# Altium PCB PCB1.PcbDoc
Units mm, origin at the board's own origin, x right, y up, seen from the top; angles counter-clockwise.
Board outline 150 x 90 mm, 2 copper layers (Top Layer, Bottom Layer); 10 components, 33 nets, 114 pads, 0 vias.
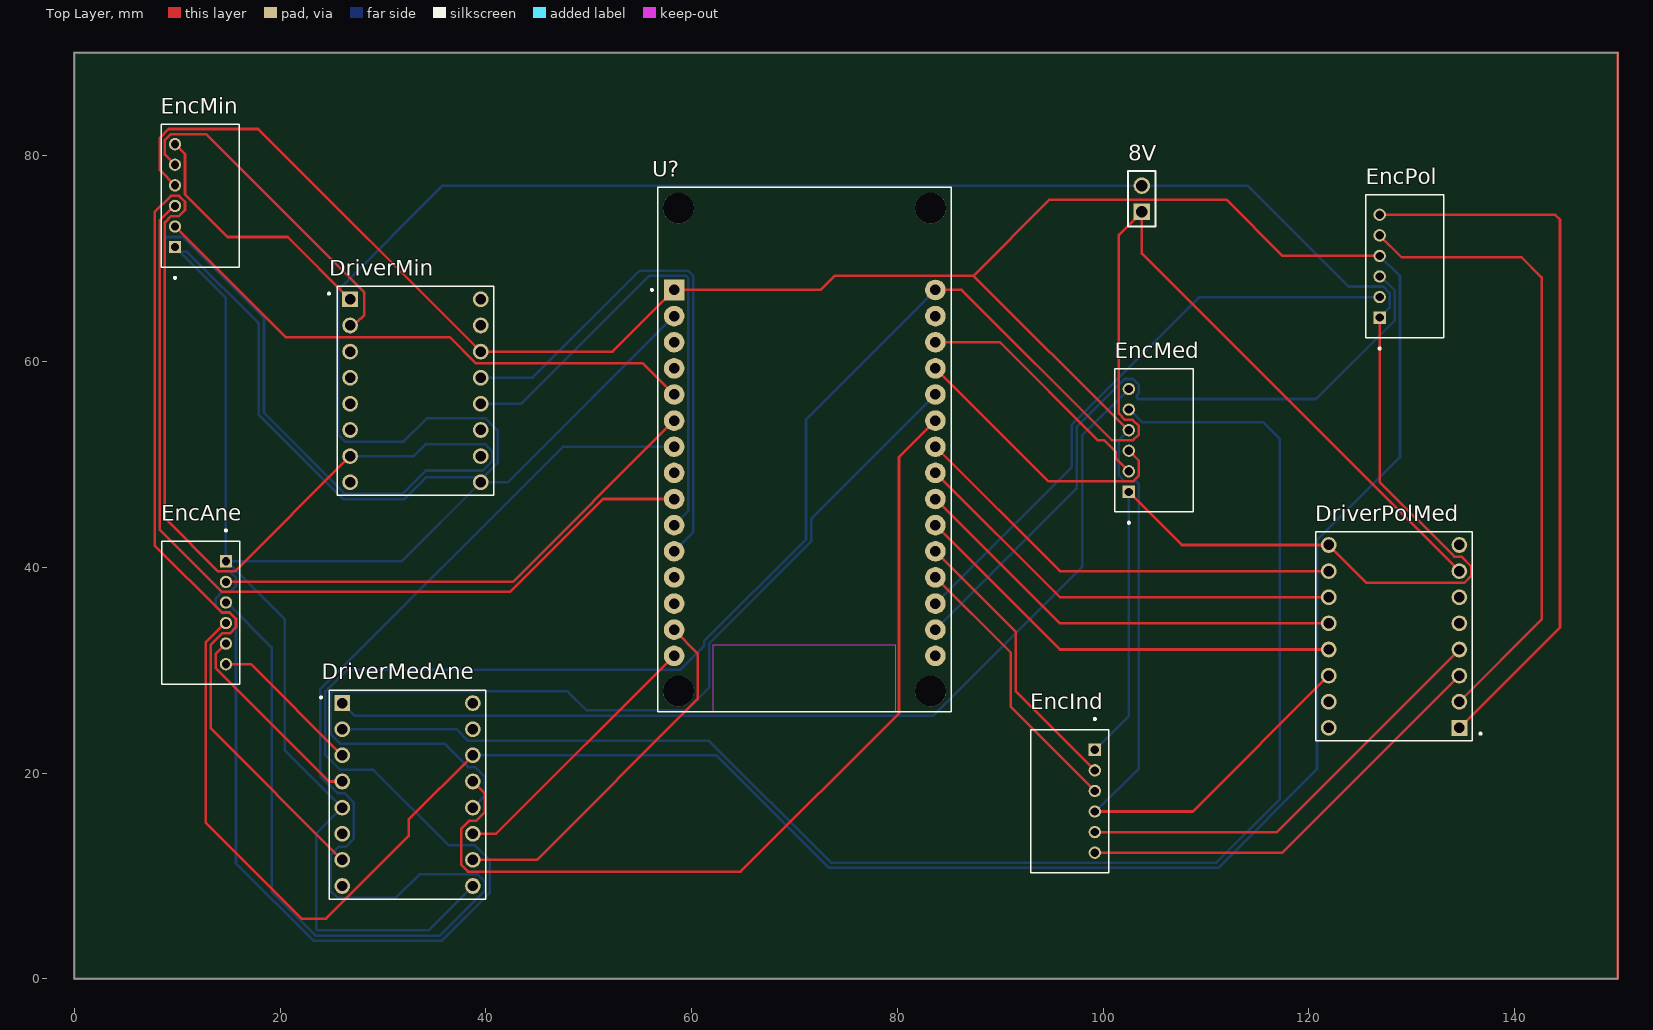
[diagram p0: Top Layer view]
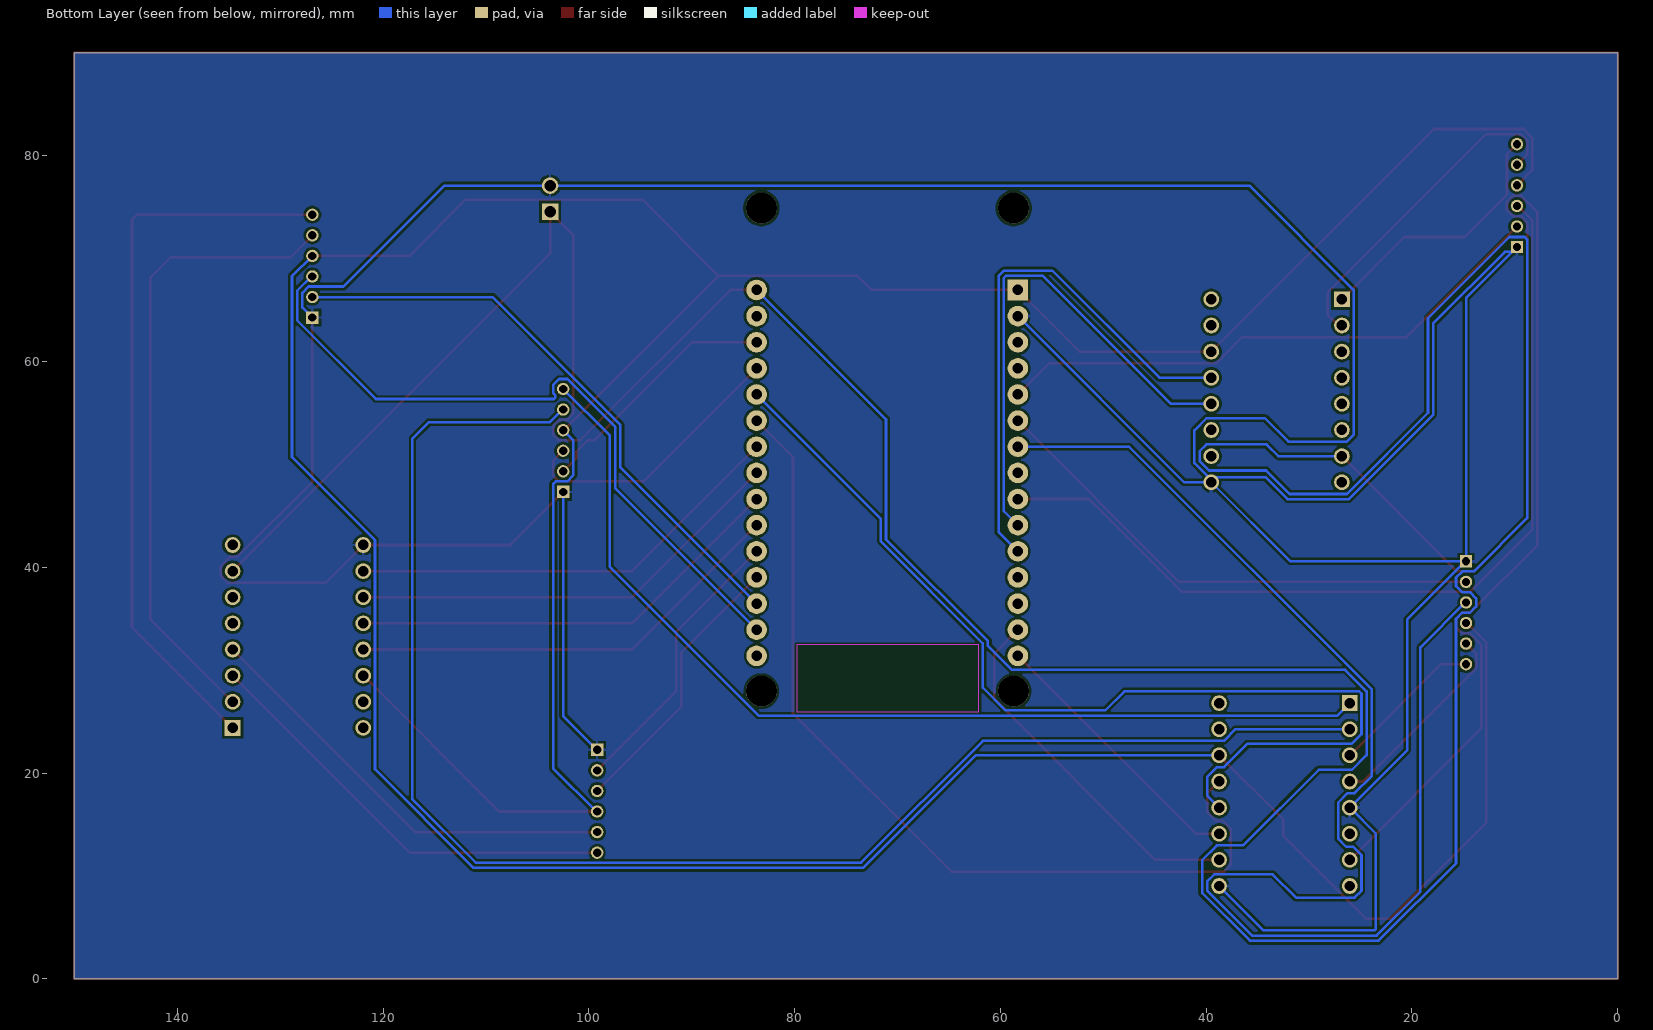
[diagram p1: Bottom Layer view, seen from below]

## Layer stack, top to bottom
Top Solder: solder mask 0.0102, Solder Resist, Dk 3.5
Top Layer: signal copper 0.0356
Dielectric 1: dielectric 0.32, FR-4, Dk 4.8
Bottom Layer: signal copper 0.0356
Bottom Solder: solder mask 0.0102, Solder Resist, Dk 3.5

## Board outline
0,0 150,0 150,90 0,90

## Design rules (kind name [scope] priority, off if disabled: settings)
Clearance [All] p1: gap=0.25 ignorepadtopadclearanceinfootprint=FALSE
HoleSize [All] p1: absolutevalues=TRUE maxlimit=10 minlimit=0.4 maxpercent=80.000 minpercent=20.000
PolygonConnect [All] p1: connectstyle=Relief reliefconductorwidth=0.254 reliefentries=4 polygonreliefangle="90 Angle" airgapwidth=0.254
RoomDefinition Sheet_Control [InComponentClass('Sheet_Control')] p1: confinementstyle=ConfineIn formatcopy=TRUE lockcomponents=FALSE outline 0,0 150.114,0 150.114,90.17 0,90.17
RoutingVias [All] p1: holewidth=0.4 width=0.9 viastyle="Through Hole" minholewidth=0.4 minwidth=0.9 maxholewidth=10 maxwidth=10
SilkToSilkClearance [All] p1: silktosilkclearance=0.25
SolderMaskExpansion [All] p1: expansion=0.102 istentingtop=FALSE
Width [All] p1: maxlimit=10 minlimit=0.25 preferedwidth=0.25
28 further rules are at their usual default settings.

## Components (designator, comment, footprint, x,y, rotation, side; value= is the part's Value field where it differs from the comment)
8V "61300211121" 61300211121 103.759,75.819 r90 top
DriverMedAne "A4990_STEPPER_MOTOR_DRIVER_CARRIER" MODULE_A4990_STEPPER_MOTOR_DRIVER_CARRIER 32.385,17.907 r0 top
DriverMin "A4990_STEPPER_MOTOR_DRIVER_CARRIER" MODULE_A4990_STEPPER_MOTOR_DRIVER_CARRIER 33.147,57.15 r0 top
DriverPolMed "A4990_STEPPER_MOTOR_DRIVER_CARRIER" MODULE_A4990_STEPPER_MOTOR_DRIVER_CARRIER 128.27,33.274 r180 top
EncAne "S6B-PH-K-S(LF)(SN)" JST_S6B-PH-K-S(LF)(SN) 14.732,35.576 r270 top
EncInd "S6B-PH-K-S(LF)(SN)" JST_S6B-PH-K-S(LF)(SN) 99.187,17.256 r270 top
EncMed "S6B-PH-K-S(LF)(SN)" JST_S6B-PH-K-S(LF)(SN) 102.489,52.324 r90 top
EncMin "S6B-PH-K-S(LF)(SN)" JST_S6B-PH-K-S(LF)(SN) 9.779,76.121 r90 top
EncPol "S6B-PH-K-S(LF)(SN)" JST_S6B-PH-K-S(LF)(SN) 126.873,69.262 r90 top
U? "ESP32-DEVKIT-V1" ESP32_DEVKIT_V1 70.993,51.435 r0 top

## Footprints (in the part's own frame and the unit in brackets; to place one, negate y for a bottom-side part, rotate by r counter-clockwise, add the part's x,y. Pads: shape width x height; smd on the part's side, far side on the other; paste and mask are expansions set on the pad)
61300211121 [mm] "Pin Header, pitch 2.54 mm, THT, Vertical, single row, 2p"
  rect 1.6x1.6 hole 1.1: 1(-1.27,0)
  round 1.6 hole 1.1: 2(1.27,0)
  silkscreen extent -2.69,-1.35 2.69,1.35, body extent -2.54,-1.27 2.54,1.27, height 8.57
ESP32_DEVKIT_V1 [mm]
  rect 2x2 hole 1.02: 1(-12.7,15.515)
  round 2 hole 1.02: 2(-12.7,12.975) 3(-12.7,10.435) 4(-12.7,7.895) 5(-12.7,5.355) 6(-12.7,2.815) 7(-12.7,0.275) 8(-12.7,-2.265) 9(-12.7,-4.805) 10(-12.7,-7.345) 11(-12.7,-9.885) 12(-12.7,-12.425) 13(-12.7,-14.965) 14(-12.7,-17.505) 15(-12.7,-20.045) 16(12.7,-20.045) 17(12.7,-17.505) 18(12.7,-14.965) 19(12.7,-12.425) 20(12.7,-9.885) 21(12.7,-7.345) 22(12.7,-4.805) 23(12.7,-2.265) 24(12.7,0.275) 25(12.7,2.815) 26(12.7,5.355) 27(12.7,7.895) 28(12.7,10.435) 29(12.7,12.975) 30(12.7,15.515)
  round 3 hole 3 unplated: ""(-12.28,-23.475) ""(-12.28,23.475) ""(12.23,-23.475) ""(12.23,23.475)
  Keep-Out Layer region: 8.78,-25.475 -8.91,-25.475 -8.91,-18.985 8.78,-18.985
  Keep-Out Layer region: 8.78,-25.475 -8.91,-25.475 -8.91,-18.985 8.78,-18.985
  Keep-Out Layer region: 8.78,-25.475 -8.91,-25.475 -8.91,-18.985 8.78,-18.985
  silkscreen extent -14.95,-25.48 14.23,25.48, body extent -14.48,-25.5 14.02,25.43, height 9.22
JST_S6B-PH-K-S(LF)(SN) [mm]
  rect 1.2x1.2 hole 0.8: 1(-5,0)
  round 1.2 hole 0.8: 2(-3,0) 3(-1,0) 4(1,0) 5(3,0) 6(5,0)
  silkscreen extent -8.1,-6.25 6.95,1.35
MODULE_A4990_STEPPER_MOTOR_DRIVER_CARRIER [mm]
  rect 1.53x1.53 hole 1.02: 1(-6.35,8.89)
  round 1.53 hole 1.02: 2(-6.35,6.35) 3(-6.35,3.81) 4(-6.35,1.27) 5(-6.35,-1.27) 6(-6.35,-3.81) 7(-6.35,-6.35) 8(-6.35,-8.89) 9(6.35,-8.89) 10(6.35,-6.35) 11(6.35,-3.81) 12(6.35,-1.27) 13(6.35,1.27) 14(6.35,3.81) 15(6.35,6.35) 16(6.35,8.89)
  silkscreen extent -8.5,-10.16 7.62,10.16

## Part data
8V: "WR-PHD Pin Header, THT, pitch 2.54mm, Single Row, Vertical, 2pin", Contact Resistance=20mOhm, Operating Temperature="-40 to +105degC", Rated Current=3A, Withstanding Voltage=500VAC, Working Voltage=250VAC, ComponentLink1Description=Manufacturer, ComponentLink1URL=http://www.we-online.de, ComponentLink2Description=Datasheet, ComponentLink2URL=https://katalog.we-online.de/em/datasheet/6130xx11121.pdf, Gender=Male, Mounting Technology=THT, Orientation=Vertical, Packaging=Bag, Part Number=61300211121, Pin Number=2, Pitch=2.54mm, Published Date="June 2019", Publisher="Wurth Elektronik", Row Number=Single
DriverMedAne DriverMin DriverPolMed: "Stepper motor controler; IC: A4990", Package=None, Availability=Unavailable, MP=A4988_STEPPER_MOTOR_DRIVER_CARRIER, Price=None
EncAne EncInd EncMed EncMin EncPol: "PH Series 6 Position 2 mm Pitch Through Hole Side Entry Shrouded Header", Package=None, Availability=Unavailable, MP=S6B-PH-K-S(LF)(SN), Price=None
U?: "Dual core, Wi-Fi: 2.4 GHz up to 150 Mbits/s,BLE (Bluetooth Low Energy) and legacy Bluetooth, 32 bits, Up to 240 MHz", Package=None, Availability="Not in stock", Check_prices=https://www.snapeda.com/parts/ESP32-DEVKIT-V1/Do+it/view-part/?ref=eda, MF="Do it", MP=ESP32-DEVKIT-V1, Price=None, SnapEDA_Link=https://www.snapeda.com/parts/ESP32-DEVKIT-V1/Do+it/view-part/?ref=snap

## Nets (pads, with @x,y where several pads share a name; then routed paths per layer and width w, separated by ;. In a path a pad name is that pad's centre, name@x,y a point inside that pad or via, vN(x,y) a via of type N, cw(c..) or ccw(c..) an arc to the next point about the centre after c; other vN are vias at no path point)
Net8V_1: 8V.1 DriverMedAne.7 DriverMin.7 DriverPolMed.7 U?.30 | length 504.6
  Top Layer w0.25: DriverMedAne.7 13.257,24.335 13.257,32.48 14.353,33.576 15.111,33.576 15.707,34.172 15.707,34.98 15.086,35.601 14.328,35.601 7.804,42.125 7.804,74.525 9.375,76.096 10.183,76.096 10.754,75.525 10.754,74.717 10.158,74.121 9.4,74.121 8.804,73.525 8.804,44.774 13.977,39.601 15.598,39.601 DriverMin.7 ; U?.30 86.229,66.95 100.83,52.349 102.893,52.349 103.464,52.92 103.464,53.728 102.868,54.324 102.11,54.324 101.514,54.92 101.514,72.304 8V.1 103.759,70.485 DriverPolMed.7
  Bottom Layer w0.25: DriverMin.7 32.986,50.8 34.126,51.94 39.969,51.94 40.637,51.272 40.637,50.328 39.709,49.4 34.157,49.4 31.877,47.12 26.325,47.12 18.43,55.015 18.43,64.201 10.534,72.096 9.024,72.096 8.804,71.876 8.804,44.774 13.977,39.601 15.086,39.601 15.707,38.98 15.707,38.172 15.111,37.576 14.353,37.576 13.757,36.98 13.757,36.172 14.353,35.576 15.111,35.576 15.707,34.98 15.707,11.219 23.227,3.699 35.736,3.699 40.375,8.338 40.375,11.529 38.947,12.957 36.407,12.957 29.047,20.317 25.823,20.317 24.395,21.745 24.395,27.924 26.486,30.015 58.863,30.015 61.208,32.36 61.208,32.812 71.11,42.715 71.11,54.367 U?.30
Net8V_2: 8V.2 DriverMedAne.5 DriverMedAne.9 DriverMin.9 DriverPolMed.9 EncAne.1 EncInd.1 EncMed.1 EncMin.1 EncPol.1 U?.2 | length 432.9
  Top Layer w0.25: EncMed.1 107.649,42.164 DriverPolMed.9 125.6,38.484 135.092,38.484 135.76,39.152 135.76,40.096 134.832,41.024 134.148,41.024 126.873,48.299 EncPol.1
  Bottom Layer w0.25: EncMin.1 EncMin.1@10.254,70.646 ; DriverMedAne.9 34.417,4.699 23.641,4.699 23.495,4.845 23.495,14.097 DriverMedAne.5 20.463,22.209 20.463,34.931 15.293,40.101 15.207,40.101 EncAne.1 ; U?.2 42.143,48.26 DriverMin.9 31.813,40.576 EncAne.1 ; EncInd.1 102.489,25.558 EncMed.1 ; EncPol.1 127.848,65.237 127.848,66.666 127.227,67.287 123.848,67.287 114.046,77.089 8V.2 35.786,77.089 25.657,66.96 25.657,52.868 26.325,52.2 32.007,52.2 34.287,54.48 39.969,54.48 41.137,53.312 41.137,50.121 39.776,48.76 34.224,48.76 32.084,46.62 26.118,46.62 17.93,54.808 17.93,63.678 10.961,70.646 EncMin.1@10.254,70.646 ; EncMin.1@10.254,70.646 14.732,66.168 EncAne.1
NetDriverMedAne_1: DriverMedAne.1 EncMed.6 | length 97.6
  Bottom Layer w0.25: DriverMedAne.1 27.247,25.585 83.5,25.585 97.947,40.032 97.947,52.782 EncMed.6
NetDriverMedAne_2: DriverMedAne.2 EncMed.5 | length 149.9
  Bottom Layer w0.25: DriverMedAne.2 37.123,24.257 38.263,23.117 61.7,23.117 73.536,11.281 110.987,11.281 117.14,17.435 117.14,52.506 115.537,54.11 103.789,54.11 102.575,55.324 EncMed.5
NetDriverMedAne_3: DriverMedAne.3 EncAne.6 | length 15
  Top Layer w0.25: EncAne.6 17.176,30.576 DriverMedAne.3
NetDriverMedAne_4: DriverMedAne.4 EncAne.5 | length 19.6
  Top Layer w0.25: EncAne.5 13.757,31.601 13.757,30.172 24.752,19.177 DriverMedAne.4
NetDriverMedAne_10: DriverMedAne.10 U?.14 | length 36
  Top Layer w0.25: DriverMedAne.10 44.962,11.557 60.588,27.183 60.588,31.635 U?.14
NetDriverMedAne_11: DriverMedAne.11 U?.15 | length 26.7
  Top Layer w0.25: DriverMedAne.11 41,14.097 U?.15
NetDriverMedAne_12: DriverMedAne.12 U?.26 | length 100.3
  Bottom Layer w0.25: DriverMedAne.12 39.875,17.777 39.875,19.649 38.947,20.577 38.263,20.577 35.983,22.857 25.823,22.857 24.895,23.785 24.895,27.717 25.115,27.937 47.95,27.937 49.802,26.085 59.49,26.085 61.708,28.303 61.708,32.605 71.61,42.508 71.61,44.707 U?.26
NetDriverMedAne_13: DriverMedAne.13 U?.25 | length 89
  Top Layer w0.25: DriverMedAne.13 39.875,18.037 39.875,16.165 39.077,15.367 38.393,15.367 37.595,14.569 37.595,11.085 38.263,10.417 64.76,10.417 80.148,25.805 80.148,50.705 U?.25
NetDriverMedAne_14: DriverMedAne.14 DriverMin.14 DriverPolMed.14 EncAne.4 EncInd.4 EncMed.4 EncMin.4 EncPol.4 U?.1 | length 434
  Top Layer w0.25: EncMin.4 8.304,78.596 8.304,81.732 9.168,82.596 17.861,82.596 DriverMin.14 52.303,60.96 U?.1 72.512,66.95 73.887,68.325 87.402,68.325 ; EncAne.4 14.646,34.576 12.757,32.687 12.757,15.183 22.098,5.842 24.472,5.842 32.499,13.868 32.499,15.481 DriverMedAne.14 ; EncInd.4 108.712,16.256 DriverPolMed.14 ; EncMed.4 102.403,53.324 87.402,68.325 ; EncPol.4 117.441,70.262 111.979,75.724 94.801,75.724 87.402,68.325
  Bottom Layer w0.25: DriverMedAne.14 62.392,21.717 73.328,10.781 111.194,10.781 120.78,20.367 120.78,42.636 128.848,50.704 128.848,68.287 EncPol.4 ; EncInd.4 99.273,16.256 103.464,20.447 103.464,48.079 103.194,48.349 102.085,48.349 101.514,48.92 101.514,52.349 EncMed.4
NetDriverMin_1: DriverMin.1 EncMin.6 | length 25.6
  Top Layer w0.25: EncMin.6 10.754,80.146 10.754,76.232 14.89,72.096 20.741,72.096 DriverMin.1
NetDriverMin_2: DriverMin.2 EncMin.5 | length 32.8
  Top Layer w0.25: EncMin.5 8.804,80.096 8.804,81.525 9.375,82.096 12.801,82.096 28.194,66.703 28.194,64.535 27.799,64.14 27.769,64.14 27.129,63.5 DriverMin.2
NetDriverMin_12: DriverMin.12 U?.10 | length 50
  Bottom Layer w0.25: DriverMin.12 43.423,55.88 55.868,68.325 59.448,68.325 59.668,68.105 59.668,45.465 U?.10
NetDriverMin_13: DriverMin.13 U?.11 | length 52.7
  Bottom Layer w0.25: DriverMin.13 44.547,58.42 54.952,68.825 59.655,68.825 60.168,68.312 60.168,43.425 U?.11
NetDriverPolMed_1: DriverPolMed.1 EncPol.6 | length 71.2
  Top Layer w0.25: EncPol.6 143.924,74.262 144.399,73.787 144.399,34.163 DriverPolMed.1
NetDriverPolMed_2: DriverPolMed.2 EncPol.5 | length 62
  Top Layer w0.25: EncPol.5 129.005,70.13 140.671,70.13 142.621,68.18 142.621,34.925 DriverPolMed.2
NetDriverPolMed_3: DriverPolMed.3 EncInd.6 | length 42.6
  Top Layer w0.25: EncInd.6 117.412,12.256 DriverPolMed.3
NetDriverPolMed_4: DriverPolMed.4 EncInd.5 | length 42.8
  Top Layer w0.25: EncInd.5 116.872,14.256 DriverPolMed.4
NetDriverPolMed_10: DriverPolMed.10 U?.24 | length 43.2
  Top Layer w0.25: U?.24 95.779,39.624 DriverPolMed.10
NetDriverPolMed_11: DriverPolMed.11 U?.23 | length 43.2
  Top Layer w0.25: U?.23 95.779,37.084 DriverPolMed.11
NetDriverPolMed_12: DriverPolMed.12 U?.22 | length 43.2
  Top Layer w0.25: U?.22 95.779,34.544 DriverPolMed.12
NetDriverPolMed_13: DriverPolMed.13 U?.21 | length 43.2
  Top Layer w0.25: U?.21 95.779,32.004 DriverPolMed.13
NetEncAne_2: EncAne.2 U?.6 | length 50.1
  Top Layer w0.25: EncAne.2 42.619,38.576 U?.6
NetEncAne_3: EncAne.3 U?.7 | length 138.6
  Bottom Layer w0.25: EncAne.3 14.818,36.576 19.174,32.22 19.174,8.459 23.434,4.199 35.529,4.199 39.875,8.545 39.875,9.489 39.207,10.157 33.525,10.157 31.245,7.877 25.563,7.877 24.895,8.545 24.895,12.029 25.693,12.827 26.377,12.827 27.175,13.625 27.175,17.109 26.247,18.037 25.563,18.037 23.895,19.705 23.895,28.132 47.473,51.71 U?.7
NetEncInd_2: EncInd.2 U?.20 | length 27.7
  Top Layer w0.25: U?.20 91.517,33.726 91.517,27.926 EncInd.2
NetEncInd_3: EncInd.3 U?.19 | length 27.2
  Top Layer w0.25: U?.19 91.017,31.686 91.017,26.426 EncInd.3
NetEncMed_2: EncMed.2 U?.28 | length 24.4
  Top Layer w0.25: U?.28 89.943,61.87 99.464,52.349 100.085,52.349 101.196,51.238 101.196,50.617 EncMed.2
NetEncMed_3: EncMed.3 U?.27 | length 27.4
  Top Layer w0.25: U?.27 94.674,48.349 102.893,48.349 103.464,48.92 103.464,50.349 EncMed.3
NetEncMin_2: EncMin.2 U?.5 | length 55.3
  Top Layer w0.25: EncMin.2 20.54,62.36 36.485,62.36 39.025,59.82 55.263,59.82 U?.5
NetEncMin_3: EncMin.3 U?.9 | length 88.4
  Top Layer w0.25: EncMin.3 9.693,75.121 8.304,73.732 8.304,43.625 14.328,37.601 42.351,37.601 51.38,46.63 U?.9
NetEncPol_2: EncPol.2 U?.18 | length 57.9
  Bottom Layer w0.25: U?.18 96.947,49.724 96.947,53.868 109.341,66.262 EncPol.2
NetEncPol_3: EncPol.3 U?.17 | length 68.2
  Bottom Layer w0.25: U?.17 97.447,47.684 97.447,53.661 102.085,58.299 102.893,58.299 103.464,57.728 103.464,56.92 103.246,56.703 103.246,56.495 103.393,56.349 120.69,56.349 128.348,64.007 128.348,66.873 126.959,68.262 EncPol.3
pads on no net: DriverMedAne.6 DriverMedAne.8 DriverMedAne.15 DriverMedAne.16 DriverMin.3 DriverMin.4 DriverMin.5 DriverMin.6 DriverMin.8 DriverMin.10 DriverMin.11 DriverMin.15 DriverMin.16 DriverPolMed.5 DriverPolMed.6 DriverPolMed.8 DriverPolMed.15 DriverPolMed.16 U?. U?.3 U?.4 U?.8 U?.12 U?.13 U?.16 U?.29
copper on no net: | length 480
  Top Layer w0.254: 0,0 150,0 150,90 0,90 0,0

## Polygon pours and split planes (outlines as drawn)
Net8V_2 on Bottom Layer "NET8V_2_L02_P002" (solid, pour order 2): 0,0 0,90.043 149.987,90.043 149.987,0